# Altium PCB view_PCB_5_Braco_so_motores.PcbDoc
Units mm, origin at the board's own origin, x right, y up, seen from the top; angles counter-clockwise.
Board outline 148.5 x 97 mm, 2 copper layers (Top Layer, Bottom Layer); 75 components, 78 nets, 227 pads, 19 vias.
Unrouted connection lines stored in the file: 1.
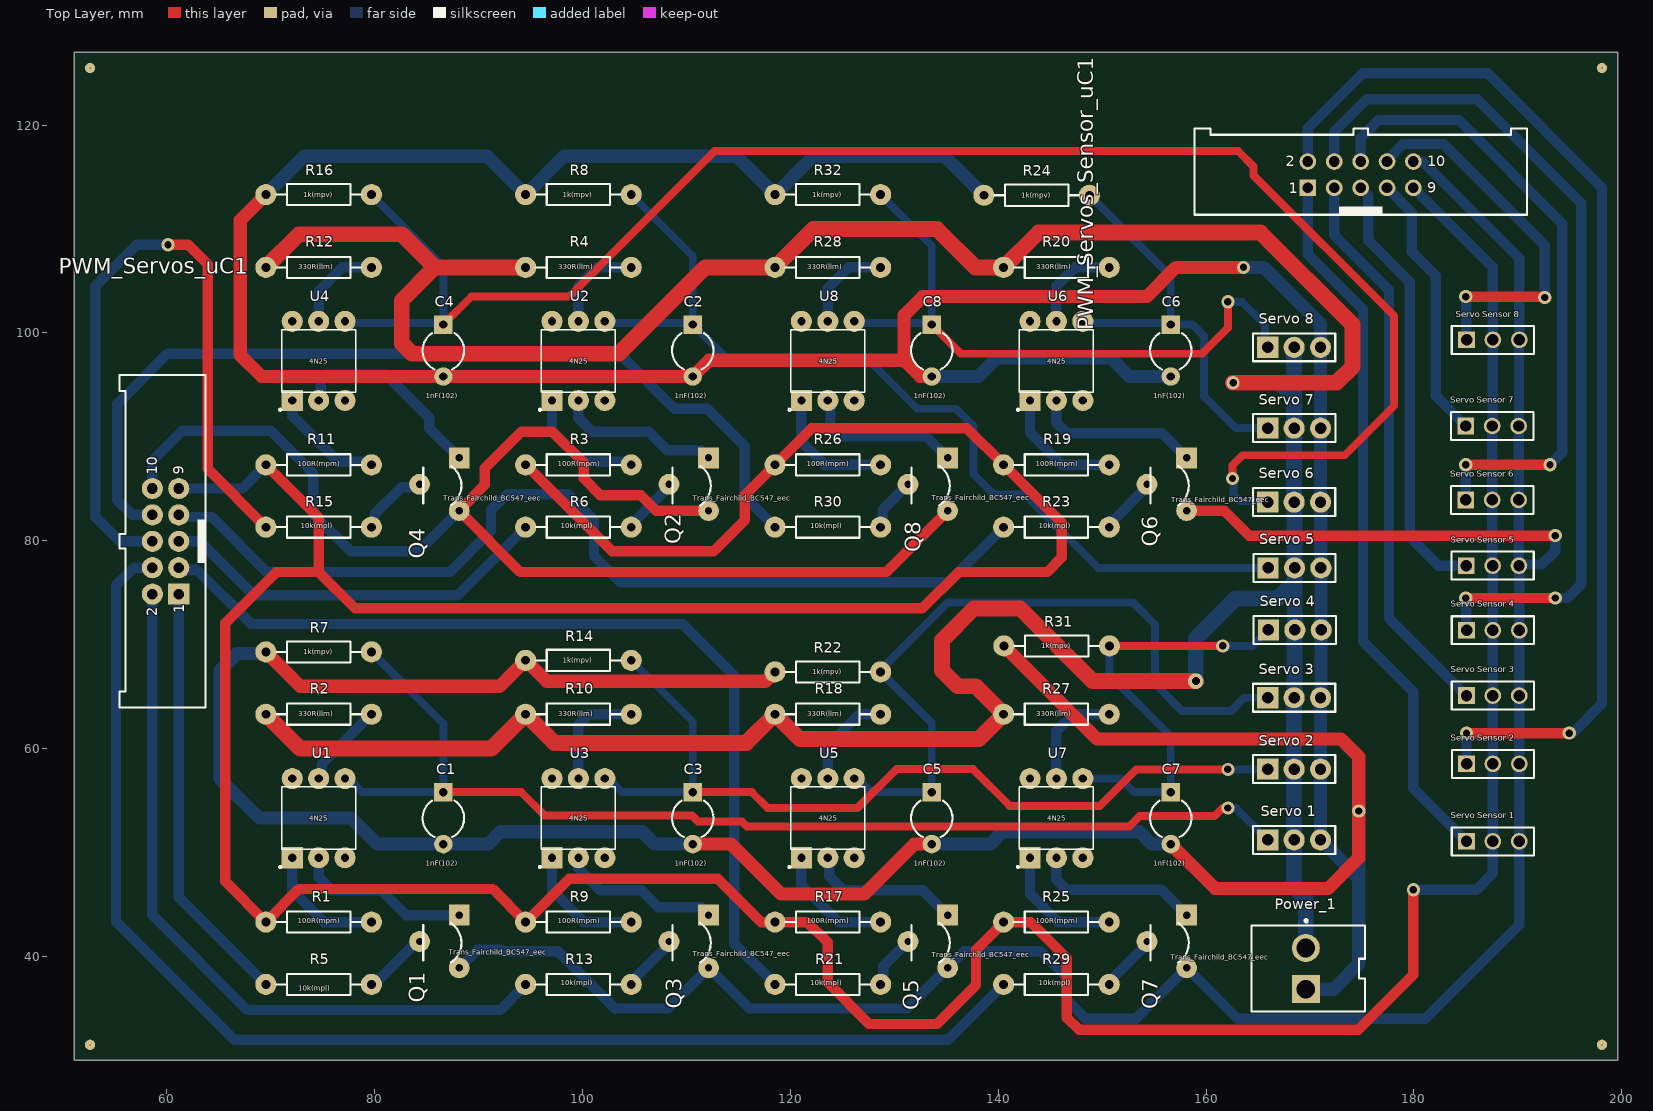
[diagram p0: Top Layer view]
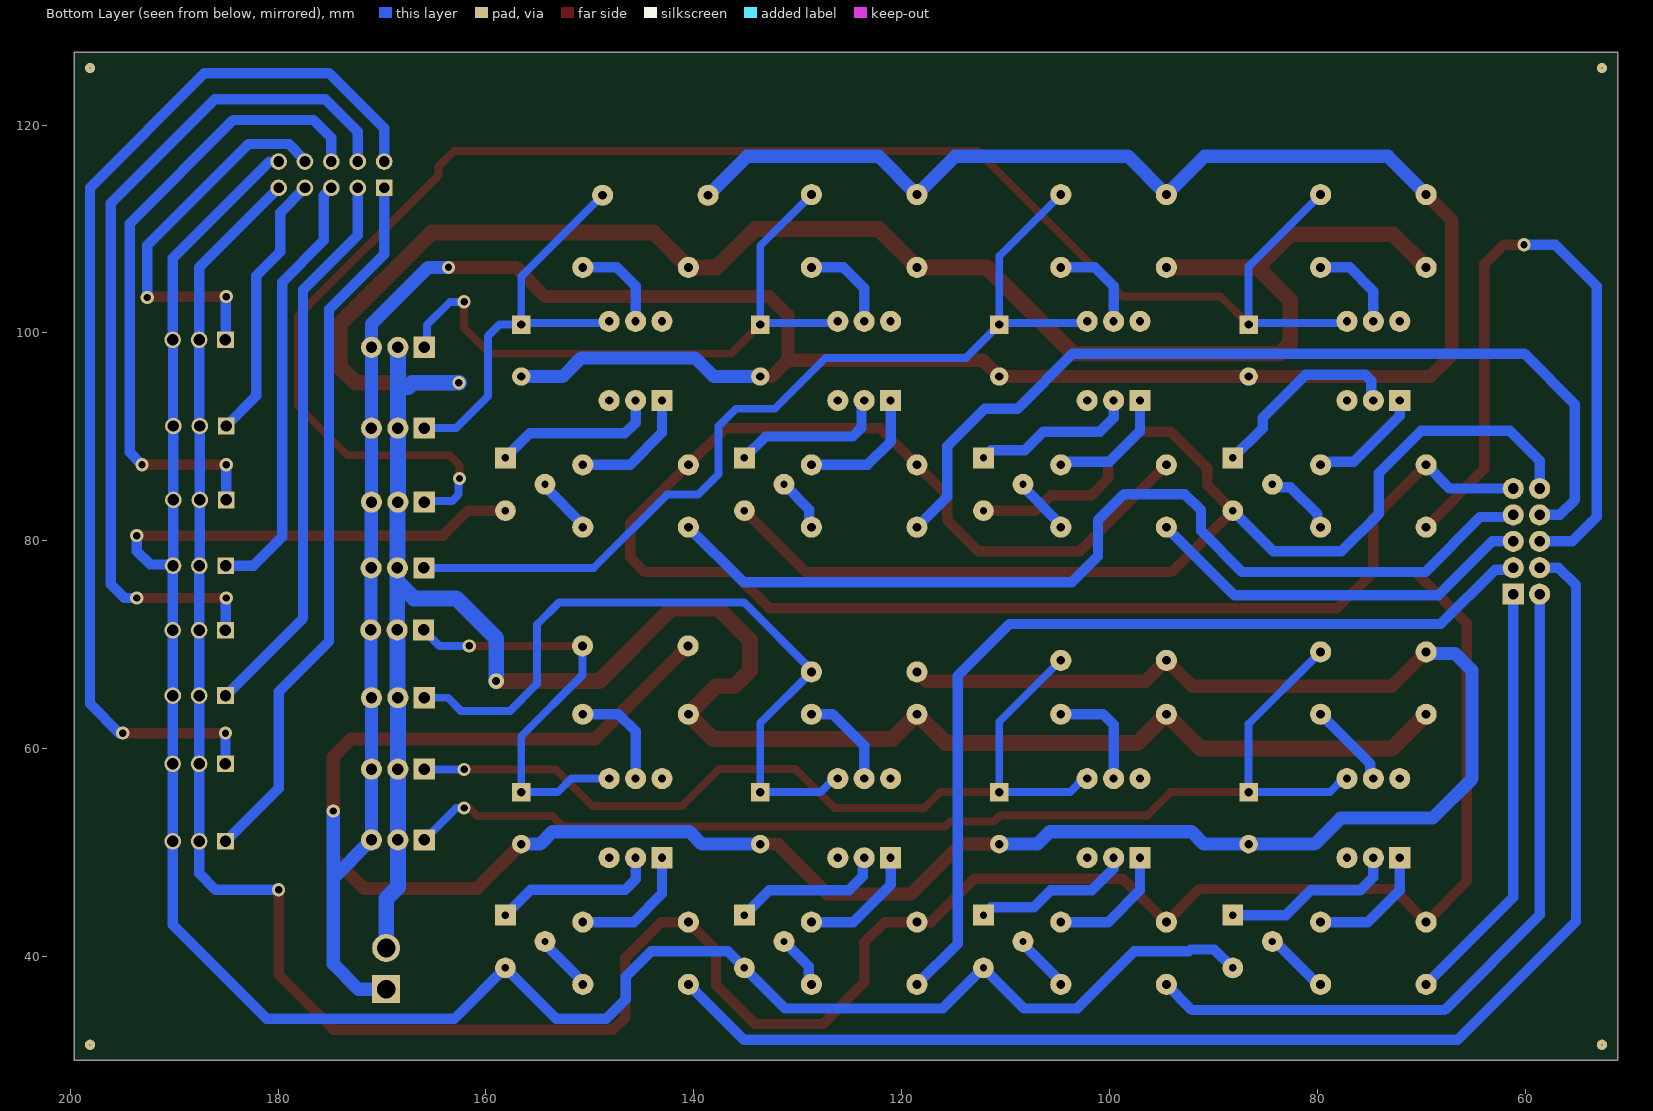
[diagram p1: Bottom Layer view, seen from below]
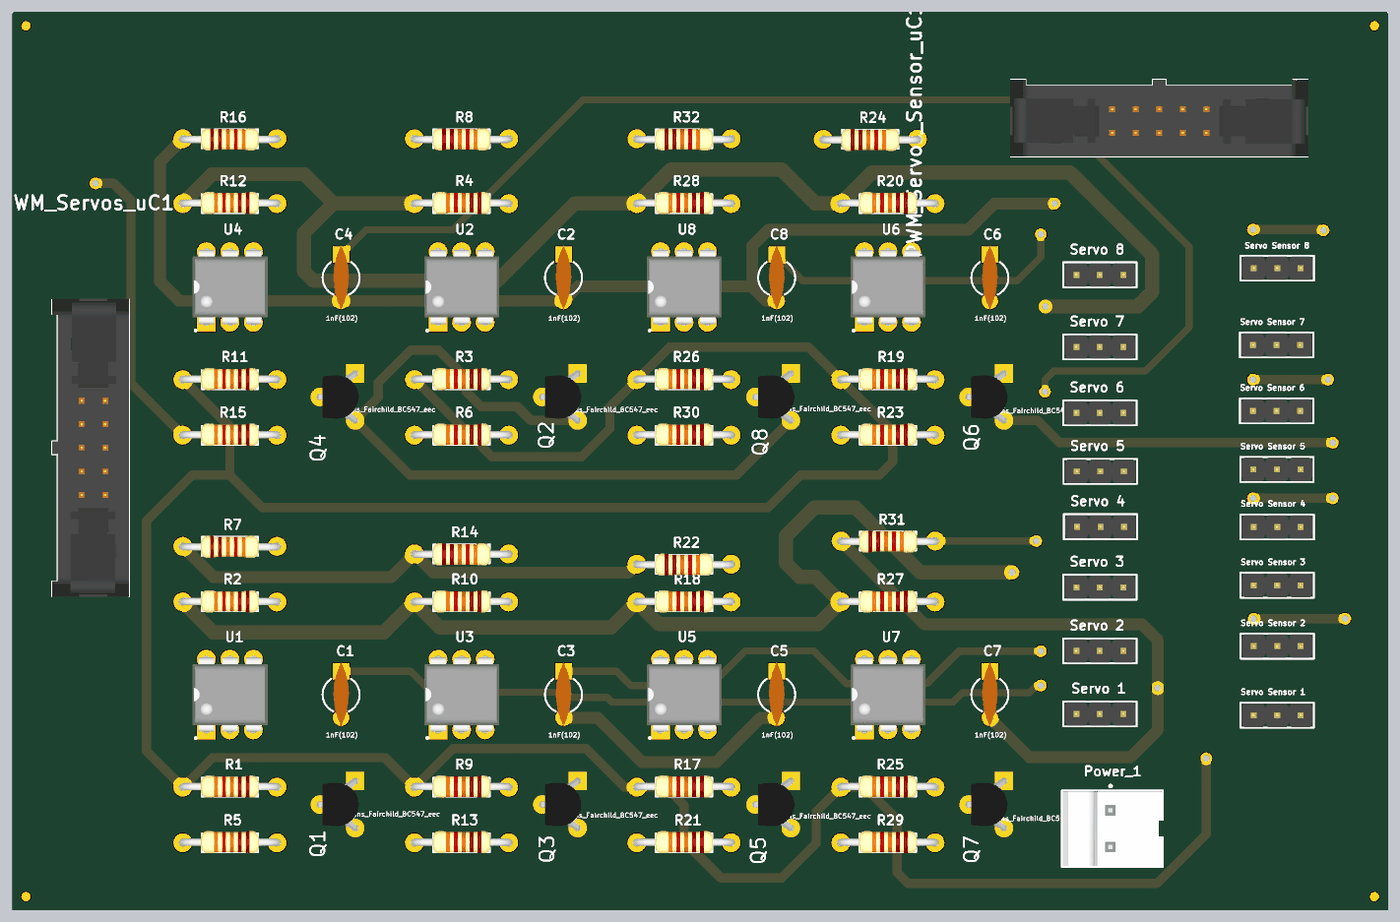
[diagram p2: 3D render of the assembled board from above, using the file's embedded part models]

## Layer stack, top to bottom
Top Solder: solder mask 0.0102, Solder Resist, Dk 3.5
Top Layer: signal copper 0.0356
Dielectric 1: dielectric 0.32, FR-4, Dk 4.8
Bottom Layer: signal copper 0.0356
Bottom Solder: solder mask 0.0102, Solder Resist, Dk 3.5

## Board outline
51.096,127 199.596,127 199.596,30 51.096,30

## Design rules (kind name [scope] priority, off if disabled: settings)
Clearance [All] p1: gap=0.1 ignorepadtopadclearanceinfootprint=FALSE except(0: Arc-Hole Track-Hole SMDPad-Hole THPad-Hole Via-Hole Fill-Hole Poly-Hole Region-Hole Text-Hole; 0.254: Arc-SMDPad Arc-THPad Arc-Via Arc-Text Track-SMDPad Track-THPad Track-Via Track-Text SMDPad-SMDPad SMDPad-THPad SMDPad-Via SMDPad-Text THPad-THPad THPad-Via THPad-Text Via-Via Via-Text Fill-Text Poly-Text Region-Text Text-Text)
ParallelSegment [All] p1: limit=800.217 gap=0.25
PolygonConnect [All] p1: connectstyle=Relief reliefconductorwidth=0.254 reliefentries=4 polygonreliefangle="90 Angle" airgapwidth=0.254
RoutingCorners [All] p1: cornerstyle=45-Degree minsetback=5.08 maxsetback=2.54
RoutingPriority [OnLayer('Bottom Layer')] p1: routingpriority=6
RoutingVias [All] p1: holewidth=0.711 width=1.57 viastyle="Through Hole" minholewidth=0.711 minwidth=1.27 maxholewidth=0.711 maxwidth=1.67
SolderMaskExpansion [All] p1: expansion=0.102
UnRoutedNet [All] p1: checkbadconnections=TRUE
Width "Schematic Width Constraint_9" [InNet('GND_8V')] p1: maxlimit=1.27 minlimit=1.27 preferedwidth=1.27
Width "Schematic Width Constraint_7" [InNet('Servo_2')] p2: maxlimit=0.762 minlimit=0.762 preferedwidth=0.762
Width "Schematic Width Constraint_6" [InNet('Servo_3')] p3: maxlimit=0.762 minlimit=0.762 preferedwidth=0.762
Width "Schematic Width Constraint_5" [InNet('Servo_4')] p4: maxlimit=0.762 minlimit=0.762 preferedwidth=0.762
Width "Schematic Width Constraint_4" [InNet('Servo_5')] p5: maxlimit=0.762 minlimit=0.762 preferedwidth=0.762
Width "Schematic Width Constraint_3" [InNet('Servo_6')] p6: maxlimit=0.762 minlimit=0.762 preferedwidth=0.762
Width "Schematic Width Constraint_2" [InNet('Servo_8')] p7: maxlimit=0.762 minlimit=0.762 preferedwidth=0.762
Width "Schematic Width Constraint_1" [InNet('Servo_7')] p8: maxlimit=0.762 minlimit=0.762 preferedwidth=0.762
Width "Schematic Width Constraint_8" [InNet('Servo_1')] p9: maxlimit=0.762 minlimit=0.762 preferedwidth=0.762
Width "Schematic Width Constraint" [InNet('VCC_8V')] p10: maxlimit=1.524 minlimit=1.27 preferedwidth=1.524
Width [All] p11: maxlimit=2 minlimit=0.2 preferedwidth=1 minimp=50.000000 maximp=50.000000 favimp=50.000000
27 further rules are at their usual default settings.

## Components (designator, comment, footprint, x,y, rotation, side; value= is the part's Value field where it differs from the comment)
C1 "1nF(102)" CAPR5-4X5 86.596,53.314 r270 top
C2 "1nF(102)" CAPR5-4X5 110.596,98.314 r270 top
C3 "1nF(102)" CAPR5-4X5 110.596,53.314 r270 top
C4 "1nF(102)" CAPR5-4X5 86.596,98.314 r270 top
C5 "1nF(102)" CAPR5-4X5 133.596,53.314 r270 top
C6 "1nF(102)" CAPR5-4X5 156.596,98.314 r270 top
C7 "1nF(102)" CAPR5-4X5 156.596,53.314 r270 top
C8 "1nF(102)" CAPR5-4X5 133.596,98.314 r270 top
Power_1 "645002114822" 645002114822 169.821,38.834 r90 top
PWM_Servos_Sensor_uC1 "61201022021" 61201022021#1 174.871,115.23 r0 top
PWM_Servos_uC1 "61201022021" 61201022021#2 59.866,79.953 r90 top
Q1 "Trans_Fairchild_BC547_eec" Fairchild_BC547_0 86.596,41.314 r180 top
Q2 "Trans_Fairchild_BC547_eec" Fairchild_BC547_0 110.596,85.314 r180 top
Q3 "Trans_Fairchild_BC547_eec" Fairchild_BC547_0 110.596,41.314 r180 top
Q4 "Trans_Fairchild_BC547_eec" Fairchild_BC547_0 86.596,85.314 r180 top
Q5 "Trans_Fairchild_BC547_eec" Fairchild_BC547_0 133.596,41.314 r180 top
Q6 "Trans_Fairchild_BC547_eec" Fairchild_BC547_0 156.596,85.314 r180 top
Q7 "Trans_Fairchild_BC547_eec" Fairchild_BC547_0 156.596,41.314 r180 top
Q8 "Trans_Fairchild_BC547_eec" Fairchild_BC547_0 133.596,85.314 r180 top
R1 "100R(mpm)" AXIAL-0.4 74.596,43.314 r180 top
R2 "330R(llm)" AXIAL-0.4 74.596,63.314 r180 top value="10K (mpl)"
R3 "100R(mpm)" AXIAL-0.4 99.596,87.314 r180 top
R4 "330R(llm)" AXIAL-0.4 99.596,106.314 r180 top
R5 "10k(mpl)" AXIAL-0.4 74.596,37.314 r180 top
R6 "10k(mpl)" AXIAL-0.4 99.596,81.314 r180 top
R7 "1k(mpv)" AXIAL-0.4 74.596,69.314 r0 top
R8 "1k(mpv)" AXIAL-0.4 99.596,113.314 r0 top
R9 "100R(mpm)" AXIAL-0.4 99.596,43.314 r180 top
R10 "330R(llm)" AXIAL-0.4 99.596,63.314 r180 top
R11 "100R(mpm)" AXIAL-0.4 74.596,87.314 r180 top
R12 "330R(llm)" AXIAL-0.4 74.596,106.314 r180 top
R13 "10k(mpl)" AXIAL-0.4 99.596,37.314 r180 top
R14 "1k(mpv)" AXIAL-0.4 99.596,68.5 r0 top
R15 "10k(mpl)" AXIAL-0.4 74.596,81.314 r180 top
R16 "1k(mpv)" AXIAL-0.4 74.596,113.314 r0 top
R17 "100R(mpm)" AXIAL-0.4 123.596,43.314 r180 top
R18 "330R(llm)" AXIAL-0.4 123.596,63.314 r180 top
R19 "100R(mpm)" AXIAL-0.4 145.596,87.314 r180 top
R20 "330R(llm)" AXIAL-0.4 145.596,106.314 r180 top
R21 "10k(mpl)" AXIAL-0.4 123.596,37.314 r180 top
R22 "1k(mpv)" AXIAL-0.4 123.596,67.388 r0 top
R23 "10k(mpl)" AXIAL-0.4 145.596,81.314 r180 top
R24 "1k(mpv)" AXIAL-0.4 143.694,113.256 r0 top
R25 "100R(mpm)" AXIAL-0.4 145.596,43.314 r180 top
R26 "100R(mpm)" AXIAL-0.4 123.596,87.314 r180 top
R27 "330R(llm)" AXIAL-0.4 145.596,63.314 r180 top
R28 "330R(llm)" AXIAL-0.4 123.596,106.314 r180 top
R29 "10k(mpl)" AXIAL-0.4 145.596,37.314 r180 top
R30 "10k(mpl)" AXIAL-0.4 123.596,81.314 r180 top
R31 "1k(mpv)" AXIAL-0.4 145.62,69.888 r0 top
R32 "1k(mpv)" AXIAL-0.4 123.596,113.314 r0 top
"Servo 1" "61300311121" 61300311121#1 168.471,51.218 r0 top
"Servo 2" "61300311121" 61300311121#1 168.471,58.027 r0 top
"Servo 3" "61300311121" 61300311121#1 168.471,64.9 r0 top
"Servo 4" "61300311121" 61300311121#1 168.537,71.433 r0 top
"Servo 5" "61300311121" 61300311121#1 168.51,77.399 r0 top
"Servo 6" "61300311121" 61300311121#1 168.471,83.723 r0 top
"Servo 7" "61300311121" 61300311121#1 168.472,90.84 r0 top
"Servo 8" "61300311121" 61300311121#1 168.471,98.624 r0 top
"Servo Sensor 1" "61300311121" 61300311121#2 187.596,51.081 r0 top
"Servo Sensor 2" "61300311121" 61300311121#2 187.602,58.537 r0 top
"Servo Sensor 3" "61300311121" 61300311121#2 187.596,65.11 r0 top
"Servo Sensor 4" "61300311121" 61300311121#2 187.602,71.398 r0 top
"Servo Sensor 5" "61300311121" 61300311121#2 187.568,77.609 r0 top
"Servo Sensor 6" "61300311121" 61300311121#2 187.529,83.933 r0 top
"Servo Sensor 7" "61300311121" 61300311121#2 187.53,91.05 r0 top
"Servo Sensor 8" "61300311121" 61300311121#2 187.602,99.341 r0 top
U1 "4N25" *DIP762W50P254L712H400Q6N 74.596,53.314 r90 top
U2 "4N25" *DIP762W50P254L712H400Q6N 99.596,97.314 r90 top
U3 "4N25" *DIP762W50P254L712H400Q6N 99.596,53.314 r90 top
U4 "4N25" *DIP762W50P254L712H400Q6N 74.596,97.314 r90 top
U5 "4N25" *DIP762W50P254L712H400Q6N 123.596,53.314 r90 top
U6 "4N25" *DIP762W50P254L712H400Q6N 145.596,97.314 r90 top
U7 "4N25" *DIP762W50P254L712H400Q6N 145.596,53.314 r90 top
U8 "4N25" *DIP762W50P254L712H400Q6N 123.596,97.314 r90 top

## Footprints (in the part's own frame and the unit in brackets; to place one, negate y for a bottom-side part, rotate by r counter-clockwise, add the part's x,y. Pads: shape width x height; smd on the part's side, far side on the other; paste and mask are expansions set on the pad)
61201022021#1 [mm] "10 pins, straight, short lever, gold plating"
  rect 1.6x1.6 hole 1.02: 1(-5.08,-1.27)
  round 1.6 hole 1.02: 2(-5.08,1.27) 3(-2.54,-1.27) 4(-2.54,1.27) 5(0,-1.27) 6(0,1.27) 7(2.54,-1.27) 8(2.54,1.27) 9(5.08,-1.27) 10(5.08,1.27)
  silkscreen extent -16,-3.85 16,4.45, body extent -16.1,-3.85 16.1,4.45, height 24.55
61201022021#2 [mm] "10 pins, straight, short lever, gold plating"
  rect 2.032x2.032 hole 1.02: 1(-5.08,-1.27)
  round 2.032 hole 1.02: 2(-5.08,1.27) 3(-2.54,-1.27) 4(-2.54,1.27) 5(0,-1.27) 6(0,1.27) 7(2.54,-1.27) 8(2.54,1.27) 9(5.08,-1.27) 10(5.08,1.27)
  silkscreen extent -16,-3.85 16,4.45, body extent -16.1,-3.85 16.1,4.45, height 24.55
61300311121#1 [mil] "Pin Header, pitch 2.54 mm, THT, Vertical, single row, 3p"
  rect 80x80 hole 43.31: 1(-100,0)
  round 80 hole 43.31: 2(0,0) 3(100,0)
  silkscreen extent -156,-53 156,53, body extent -150,-50 150,50, height 337
61300311121#2 [mil] "Pin Header, pitch 2.54 mm, THT, Vertical, single row, 3p"
  rect 62.99x62.99 hole 43.31: 1(-100,0)
  round 62.99 hole 43.31: 2(0,0) 3(100,0)
  silkscreen extent -156,-53 156,53, body extent -150,-50 150,50, height 337
645002114822 [mm] "3.96mm Male Locking Header, 2p"
  round 2.7 hole 1.8: 1(1.98,0.225)
  rect 2.7x2.7 hole 1.8: 2(-1.98,0.225)
  silkscreen extent -4.14,-5.45 4.72,5.45, body extent -4.01,-5.37 4.01,5.38, height 13.89
*DIP762W50P254L712H400Q6N [mil]
  rect 80x80 hole 31.5: 1(-150,100)
  round 80 hole 31.5: 2(-150,0) 3(-150,-100) 4(150,-100) 5(150,0) 6(150,100)
  silkscreen extent -189,-140 118,150, body extent -157,-160 157,158, height 180
AXIAL-0.4 [mil] "Axial Device, Thru-Hole; 2 Leads; 0.4 in Pin Spacing"
  round 80 hole 33.46: 1(-200,0) 2(200,0)
  silkscreen extent -160,-40 160,40, body extent -213,-49 213,45, height 142
CAPR5-4X5 [mil] "Capacitor; 2 Leads"
  rect 70x70 hole 31.5: 1(-98.43,0)
  round 70 hole 31.5: 2(98.42,0)
  silkscreen extent -66,-79 72,79, body extent -138,-33 138,33, height 335
Fairchild_BC547_0 [mm]
  rect 2x2 hole 0.71 paste-1000 mask+0: 1(-1.524,-2.667)
  round 2 hole 0.71 paste-1000 mask+0: 2(2.286,-0.127) 3(-1.524,2.413)
  silkscreen extent -1.74,-1.9 1.93,1.9, body extent -1.91,-2.92 8,2.67, height 10.54

## Part data
C1 C2 C3 C4 C5 C6 C7 C8: library part Cap2, "Capacitor", PackageDescription="Capacitor; 2 Leads", PackageReference=CAPR5-4X5, Published=23-Sep-2002, Publisher="Altium Limited"
Power_1: "WR-WTB THT Male Vertical Locking Header, pitch 3.96mm, 2p", Contact Resistance=20mOhm, Operating Temperature="-40 to +105degC", Rated Current=7A, Withstanding Voltage=1500VAC, Working Voltage=250VAC, ComponentLink1Description=Manufacturer, ComponentLink1URL=http://www.we-online.de, ComponentLink2Description=Datasheet, ComponentLink2URL=https://www.we-online.com/catalog/datasheet/645002114822.pdf, Gender=Male, Mounting Technology=THT, Packaging=Bag, Part Number=645002114822, Pin Number=2, Pitch=3.96mm, Published Date="January 2020", Publisher="Wurth Elektronik", Type=Vertical
PWM_Servos_Sensor_uC1 PWM_Servos_uC1: "Male Box Header WR-BHD with lever, THT, Vertical, pitch 2.54 mm, 10 pins", Contact Resistance="20 mOhm", Operating Temperature="-40 to 125 degC", Withstanding Voltage="500 VAC", Working Voltage="250 VAC", ComponentLink1Description=Manufacturer, ComponentLink1URL=http://www.we-online.de, ComponentLink2Description=Datasheet, ComponentLink2URL=https://katalog.we-online.de/em/datasheet/6120xx22021.pdf, Gender=Male, Mounting Technology=THT, Orientation=Vertical, Packaging=Tray, Part Number=61201022021, Pin Number=10, Pitch="2.54 mm", Published Date="August 2018", Publisher="Wurth Elektronik"
Q1 Q2 Q3 Q4 Q5 Q6 Q7 Q8: "TRANS NPN 45V 0.1A TO-92", Digikey Part Number=BC547-ND, Manufacturer=Fairchild, Mouser Part Number=512-BC547, Package=TO-92, Part Number=BC547, Power=500mW, Temperature="-65°C to +150°C", Temperature Range High=+150°C, Temperature Range Low=-65°C, ComponentLink1Description=Upverter, ComponentLink1URL=https://upverter.com/upn/revision/b6c8bf2a31a37ee3/, ComponentLink2Description=Datasheet, ComponentLink2URL=https://upverter.com/datasheet/00a4bcea94b7f6a06c7169869aec7b7ac700d7c3.pdf, Digikey Description="TRANS NPN 45V 0.1A TO-92", helpURL=https://upverter.com/upn/revision/b6c8bf2a31a37ee3/, Ipc Land Pattern Name=TO-92, Lead Free=yes, RoHS=TRUE, Supplier 1=Digi-Key, Supplier 2=Mouser, Supplier Part Number 1=BC547-ND, Supplier Part Number 2=512-BC547
R1 R2 R3 R4 R5 R6 R7 R8 R9 R10 R11 R12 R13 R14 R15 R16 R17 R18 R19 R20 R21 R22 R23 R24 R25 R26 R27 R28 R29 R30 R31 R32: library part Res2, "Resistor", LatestRevisionDate=17-Jul-2002, LatestRevisionNote="Re-released for DXP Platform.", PackageDescription="Axial Device, Thru-Hole; 2 Leads; 0.4 in Pin Spacing", PackageReference=AXIAL-0.4, Published=8-Jun-2000, Publisher="Altium Limited"
"Servo 1" "Servo 2" "Servo 3" "Servo 4" "Servo 5" "Servo 6" "Servo 7" "Servo 8" "Servo Sensor 1" "Servo Sensor 2" "Servo Sensor 3" "Servo Sensor 4" "Servo Sensor 5" "Servo Sensor 6" "Servo Sensor 7" "Servo Sensor 8": "WR-PHD Pin Header, THT, pitch 2.54mm, Single Row, Vertical, 3pin", Contact Resistance=20mOhm, Operating Temperature="-40 to +105degC", Rated Current=3A, Withstanding Voltage=500VAC, Working Voltage=250VAC, ComponentLink1Description=Manufacturer, ComponentLink1URL=http://www.we-online.de, ComponentLink2Description=Datasheet, ComponentLink2URL=https://katalog.we-online.de/em/datasheet/6130xx11121.pdf, Gender=Male, Mounting Technology=THT, Orientation=Vertical, Packaging=Bag, Part Number=61300311121, Pin Number=3, Pitch=2.54mm, Published Date="June 2019", Publisher="Wurth Elektronik", Row Number=Single
U1 U2 U3 U4 U5 U6 U7 U8: "Optoisolator Transistor with Base Output 5000Vrms 1 Channel 6-DIP", Package="DIP-6 Lite-On", Digi-Key_Part_Number=4N25VS-ND, Digi-Key_Purchase_URL=https://www.digikey.com/product-detail/en/vishay-semiconductor-opto-division/4N25/4N25VS-ND/1738516?utm_source=snapeda&utm_medium=aggregator&utm_campaign=symbol, MF="Vishay Semiconductor", MP=4N25, SnapEDA_Link=https://www.snapeda.com/parts/4N25/Vishay%20Semiconductor%20Opto%20Division/view-part/641454/?ref=snap

## Free pads (board coordinates)
  round 1 hole 0.1: 1(52.596,31.5) 1(52.596,125.5) 1(198.096,31.5) 1(198.096,125.5)
  round 1.524 hole 0.762: 2(159.009,66.5)

## Via types
v1: diameter 1.27, hole 0.711, Top Layer to Bottom Layer, 19 vias

## Nets (pads, with @x,y where several pads share a name; then routed paths per layer and width w, separated by ;. In a path a pad name is that pad's centre, name@x,y a point inside that pad or via, vN(x,y) a via of type N, cw(c..) or ccw(c..) an arc to the next point about the centre after c; other vN are vias at no path point)
3V3_uC: 
"ADD 1": 
"ADD 2": 
"ADD 3": 
"ADD 4": 
"ADD 5": 
"ADD 6": 
DBG0: 
DBG1: 
DBG2: 
"GND (SENSOR)": 
GND_8V: "Servo 1.3" "Servo 2.3" "Servo 3.3" "Servo 4.3" "Servo 5.3" "Servo 6.3" "Servo 7.3" "Servo 8.3" C1.2 C2.2 C3.2 C4.2 C5.2 C6.2 C7.2 C8.2 Power_1.2 R7.1 R8.1 R14.1 R16.1 R22.1 R24.1 R31.1 R32.1 | length 550.5
  Top Layer w1.27: R7.1 72.83,66 92.016,66 R14.1 96.536,66.48 117.608,66.48 R22.1 ; R16.1 67.059,110.856 67.059,97.874 69.119,95.814 C4.2 C2.2 112.168,97.385 130.929,97.385 ; C3.2 114.282,50.814 119.096,46 127.096,46 131.91,50.814 C5.2 ; C8.2 132.501,95.814 130.989,97.326 ; R31.1 149.511,60.917 172.991,60.917 174.696,59.212 v1(174.696,54) 174.696,49.5 171.74,46.544 160.866,46.544 C7.2 ; v1(163.596,106.314) 157.096,106.314 154.283,103.5 132.712,103.5 130.929,101.717 130.929,97.385 ; 170.865,51.072 171.011,51.218 ; 130.929,97.385 130.989,97.326 ; 130.929,97.385 130.929,97.266 130.989,97.326 ; 130.929,97.385 131.048,97.385 130.989,97.326
  Bottom Layer w1.27: R7.1 69.37,69.168 66.764,69.168 65.096,67.5 65.096,57.124 68.906,53.314 77.748,53.314 80.248,50.814 C1.2 90.91,50.814 92.096,52 105.749,52 106.936,50.814 C3.2 ; R16.1 73.203,117 90.829,117 R8.1 98.203,117 114.829,117 R32.1 122.203,117 134.871,117 R24.1 ; C5.2 139.213,50.814 140.399,52 153.596,52 154.783,50.813 C7.2 ; C8.2 138.084,95.814 139.876,97.606 150.803,97.606 152.596,95.814 C6.2 ; v1(163.596,106.314) 165.558,106.314 171.011,100.86 171.011,98.624 ; Power_1.2 172.269,36.854 174.696,39.281 174.696,47.533 ; 171.011,98.623 171.011,90.841 171.011,83.723 171.03,83.704 171.03,77.419 171.05,77.399 171.064,77.386 171.064,71.446 171.077,71.433 171.044,71.399 171.044,64.933 171.011,64.9 171.011,58.027 171.011,51.218 174.696,47.533 ; v1(174.696,54) 174.696,47.533
GND_uC: "Servo Sensor 1.3" "Servo Sensor 2.3" "Servo Sensor 3.3" "Servo Sensor 4.3" "Servo Sensor 5.3" "Servo Sensor 6.3" "Servo Sensor 7.3" "Servo Sensor 8.3" PWM_Servos_Sensor_uC1.10 PWM_Servos_uC1.10 Q1.3 Q2.3 Q3.3 Q4.3 Q5.3 Q6.3 Q7.3 Q8.3 | length 368.8
  Top Layer w1: Q2.3 107.089,82.9 105.596,84.394 101.702,84.394 100.096,86 100.096,87.5 97.096,90.5 94.116,90.5 90.596,86.98 90.596,85.377 Q4.3 94.02,77 129.219,77 Q8.3 ; Q6.3 161.756,82.9 164.156,80.5 v1(193.596,80.5)
  Bottom Layer w1: PWM_Servos_uC1.10 58.596,87.73 61.476,90.61 69.986,90.61 74.096,86.5 74.096,82.578 77.674,79 84.219,79 Q4.3 ; Q1.3 89.888,40.668 92.195,40.668 92.364,40.5 97.596,40.5 103.096,35 108.219,35 Q3.3 116.021,35 131.219,35 Q5.3 136.719,40.5 144.096,40.5 146.535,38.061 146.535,35.865 148.4,34 153.219,34 Q7.3 163.021,34 181.096,34 190.136,43.04 190.136,51.081 190.139,51.084 190.139,58.534 190.142,58.537 190.139,58.54 190.139,65.107 190.136,65.11 190.142,65.116 190.142,71.398 190.125,71.415 190.125,77.592 190.108,77.609 ; PWM_Servos_Sensor_uC1.10 180.833,116.5 190.142,107.191 190.142,99.341 190.106,99.305 190.106,91.086 190.07,91.05 190.07,83.933 190.088,83.914 190.088,77.628 190.108,77.609 ; v1(193.596,80.5) 193.596,79 192.32,77.724 190.223,77.724 190.108,77.609
I2C1-SCL: 
I2C1-SDA: 
I2C2-SCL: 
I2C2-SDA: 
I2C3-SCL: 
I2C3-SDA: 
NetQ1_1: Q1.1 U1.2 | length 16.9
  Bottom Layer w1: U1.2 74.596,47.624 75.835,46.385 80.629,46.385 83.033,43.981 Q1.1
NetQ1_2: Q1.2 R5.1 | length 6.3
  Bottom Layer w1: R5.1 79.929,37.313 84.056,41.441 Q1.2
NetQ2_1: Q2.1 U2.2 | length 15.8
  Bottom Layer w1: U2.2 99.596,91.84 100.936,90.5 106.373,90.5 108.142,88.731 111.37,88.731 Q2.1
NetQ2_2: Q2.2 R6.1 | length 5.6
  Bottom Layer w1: R6.1 104.676,81.56 108.31,85.194 Q2.2
NetQ3_1: Q3.1 U3.2 | length 15.4
  Bottom Layer w1: U3.2 99.596,48.5 101.711,46.385 105.634,46.385 107.288,44.731 111.37,44.731 Q3.1
NetQ3_2: Q3.2 R13.1 | length 5.6
  Bottom Layer w1: R13.1 104.676,37.56 108.31,41.194 Q3.2
NetQ4_1: Q4.1 U4.2 | length 19.5
  Bottom Layer w1: U4.2 74.793,93.701 74.793,95.414 75.379,96 81.096,96 85.26,91.836 85.26,90.84 Q4.1
NetQ4_2: Q4.2 R15.1 | length 6.9
  Bottom Layer w1: R15.1 79.969,81.607 79.969,82.544 82.579,85.153 84.023,85.153 Q4.2
NetQ5_1: Q5.1 U5.2 | length 14.8
  Bottom Layer w1: U5.2 123.745,49.355 123.745,47.738 125.098,46.385 132.716,46.385 Q5.1
NetQ5_2: Q5.2 R21.1 | length 5.2
  Bottom Layer w1: R21.1 128.949,37.587 128.949,39.08 Q5.2
NetQ6_1: Q6.1 U6.2 | length 16.1
  Bottom Layer w1: U6.2 145.596,91.367 146.623,90.34 155.76,90.34 Q6.1
NetQ6_2: Q6.2 R23.1 | length 5.6
  Bottom Layer w1: R23.1 150.676,81.56 154.31,85.194 Q6.2
NetQ7_1: Q7.1 U7.2 | length 16
  Bottom Layer w1: U7.2 145.596,47.425 146.596,46.425 155.676,46.425 Q7.1
NetQ7_2: Q7.2 R29.1 | length 5.6
  Bottom Layer w1: R29.1 150.676,37.56 154.31,41.194 Q7.2
NetQ8_1: Q8.1 U8.2 | length 15.2
  Bottom Layer w1: U8.2 123.857,93.242 123.857,90.872 124.69,90.04 133.06,90.04 Q8.1
NetQ8_2: Q8.2 R30.1 | length 5.2
  Bottom Layer w1: R30.1 128.873,81.511 128.873,83.004 Q8.2
NetR1_1: R1.1 U1.1 | length 12
  Bottom Layer w1: U1.1 72.056,46.385 75.127,43.314 R1.1
NetR2_1: R2.1 U1.5 | length 8.3
  Bottom Layer w1: U1.5 74.889,57.417 74.889,58.527 R2.1
NetR3_1: R3.1 U2.1 | length 11.9
  Bottom Layer w1: U2.1 97.056,90.54 99.989,87.607 104.383,87.607 R3.1
NetR4_1: R4.1 U2.5 | length 9.2
  Bottom Layer w1: U2.5 99.596,104.5 101.41,106.314 R4.1
NetR9_1: R9.1 U3.1 | length 12
  Bottom Layer w1: U3.1 97.056,46.385 100.127,43.314 R9.1
NetR10_1: R10.1 U3.5 | length 10.7
  Bottom Layer w1: U3.5 99.596,62.297 100.612,63.313 R10.1
NetR11_1: R11.1 U4.1 | length 11
  Bottom Layer w1: U4.1 72.056,92.04 76.489,87.607 79.383,87.607 R11.1
NetR12_1: R12.1 U4.5 | length 8.9
  Bottom Layer w1: U4.5 74.596,104.027 76.882,106.314 R12.1
NetR17_1: R17.1 U5.1 | length 11.7
  Bottom Layer w1: U5.1 121.056,46.925 124.667,43.314 R17.1
NetR18_1: R18.1 U5.5 | length 9.5
  Bottom Layer w1: U5.5 123.596,60.266 126.644,63.314 R18.1
NetR19_1: R19.1 U6.1 | length 12
  Bottom Layer w1: U6.1 143.056,90.38 146.123,87.314 R19.1
NetR20_1: R20.1 U6.5 | length 9.2
  Bottom Layer w1: U6.5 145.596,104.5 147.41,106.314 R20.1
NetR25_1: R25.1 U7.1 | length 12.2
  Bottom Layer w1: U7.1 143.056,46.04 145.782,43.314 R25.1
NetR26_1: R26.1 U8.1 | length 12.5
  Bottom Layer w1: U8.1 121.056,89.55 123.292,87.314 R26.1
NetR27_1: R27.1 U7.5 | length 10.3
  Bottom Layer w1: U7.5 145.596,61.667 147.243,63.314 R27.1
NetR28_1: R28.1 U8.5 | length 9.1
  Bottom Layer w1: U8.5 123.596,104.298 125.612,106.314 R28.1
PWM_Servo_1: PWM_Servos_uC1.1 R5.2 | length 41
  Bottom Layer w1: PWM_Servos_uC1.1 61.136,45.694 R5.2
PWM_Servo_2: PWM_Servos_uC1.2 R13.2 | length 71.6
  Bottom Layer w1: PWM_Servos_uC1.2 58.596,44 67.748,34.848 92.05,34.848 R13.2
PWM_Servo_3: PWM_Servos_uC1.3 R21.2 | length 89.1
  Bottom Layer w1: PWM_Servos_uC1.3 61.333,77.216 62.88,77.216 68.096,72 109.596,72 114.596,67 114.596,41.234 R21.2
PWM_Servo_4: PWM_Servos_uC1.4 R29.2 | length 128.9
  Bottom Layer w1: PWM_Servos_uC1.4 56.793,77.413 55.096,75.716 55.096,43.401 66.497,32 135.202,32 R29.2
PWM_Servo_5: PWM_Servos_uC1.5 R6.2 | length 38.2
  Bottom Layer w1: PWM_Servos_uC1.5 63.143,79.953 68.336,74.76 87.962,74.76 R6.2
PWM_Servo_6: PWM_Servos_uC1.6 R15.2 | length 69.6
  Top Layer w1: v1(60.096,108.5) 62.052,108.5 63.916,106.636 63.916,86.914 R15.2
  Bottom Layer w1: PWM_Servos_uC1.6 55.456,79.953 53.096,82.314 53.096,104.5 57.096,108.5 v1(60.096,108.5)
PWM_Servo_7: PWM_Servos_uC1.7 R23.2 | length 93.7
  Bottom Layer w1: PWM_Servos_uC1.7 61.333,82.296 64.3,82.296 69.596,77 87.225,77 91.182,80.956 91.182,82.941 92.741,84.5 98.596,84.5 101.096,82 101.096,78.511 103.607,76 135.202,76 R23.2
PWM_Servo_8: PWM_Servos_uC1.8 R30.2 | length 88.3
  Bottom Layer w1: PWM_Servos_uC1.8 56.65,82.493 55.216,83.927 55.216,93.164 60.052,98 103.551,98 108.838,92.714 111.992,92.714 115.596,89.11 115.596,84.234 R30.2
Sensor_Servo_1: "Servo Sensor 1.1" PWM_Servos_Sensor_uC1.1 | length 69.2
  Bottom Layer w1: PWM_Servos_Sensor_uC1.1 169.791,107.58 175.096,102.275 175.096,70.355 179.951,65.5 179.951,56.186 185.056,51.081
Sensor_Servo_2: "Servo Sensor 2.1" PWM_Servos_Sensor_uC1.2 | length 105.1
  Top Layer w1: v1(185.062,61.5) v1(194.941,61.5)
  Bottom Layer w1: PWM_Servos_Sensor_uC1.2 169.791,119.695 175.096,125 187.096,125 198.096,114 198.096,64.31 195.286,61.5 v1(194.941,61.5) ; 185.062,58.537 v1(185.062,61.5)
Sensor_Servo_3: "Servo Sensor 3.1" PWM_Servos_Sensor_uC1.3 | length 54.1
  Bottom Layer w1: PWM_Servos_Sensor_uC1.3 172.331,109.411 177.596,104.146 177.596,72.57 185.056,65.11
Sensor_Servo_4: "Servo Sensor 4.1" PWM_Servos_Sensor_uC1.4 | length 83.5
  Top Layer w1: v1(184.989,74.5) v1(193.596,74.5)
  Bottom Layer w1: PWM_Servos_Sensor_uC1.4 172.331,119.36 175.471,122.5 186.096,122.5 196.096,112.5 196.096,75.81 194.786,74.5 v1(193.596,74.5) ; v1(184.989,74.5) 185.026,74.463 185.026,71.434 185.062,71.398
Sensor_Servo_5: "Servo Sensor 5.1" PWM_Servos_Sensor_uC1.5 | length 42.1
  Bottom Layer w1: PWM_Servos_Sensor_uC1.5 175.596,113.235 175.596,108.902 179.596,104.903 179.596,80.386 182.372,77.609 185.028,77.609
Sensor_Servo_6: "Servo Sensor 6.1" PWM_Servos_Sensor_uC1.6 | length 61.7
  Top Layer w1: v1(184.989,87.314) v1(193.096,87.313)
  Bottom Layer w1: PWM_Servos_Sensor_uC1.6 174.896,116.525 174.896,118.8 176.596,120.5 184.289,120.5 194.286,110.503 194.286,88.503 v1(193.096,87.313) ; 184.989,83.933 v1(184.989,87.314)
Sensor_Servo_7: "Servo Sensor 7.1" PWM_Servos_Sensor_uC1.7 | length 26
  Bottom Layer w1: PWM_Servos_Sensor_uC1.7 179.793,111.578 179.793,107.803 182.096,105.5 182.096,93.944 184.99,91.05
Sensor_Servo_8: "Servo Sensor 8.1" PWM_Servos_Sensor_uC1.8 | length 36.8
  Top Layer w1: v1(184.989,103.5) 192.517,103.5 v1(192.596,103.421)
  Bottom Layer w1: PWM_Servos_Sensor_uC1.8 177.411,116.633 178.971,118.193 182.836,118.193 192.596,108.433 v1(192.596,103.421) ; v1(184.989,103.5) 185.026,103.464 185.026,99.378 185.062,99.341
Servo_1: "Servo 1.1" C1.1 R7.2 U1.4 | length 109.1
  Top Layer w0.762: C1.1 94.096,55.814 96.346,53.564 110.532,53.564 111.096,53 115.32,53 115.82,52.5 152.596,52.5 153.596,53.5 160.808,53.5 161.596,54.288 v1(162.096,54.288)
  Bottom Layer w0.762: U1.4 77.48,57.124 78.79,55.814 C1.1 86.596,62.394 R7.2 ; v1(162.096,54.288) 162.861,54.288 165.931,51.218
Servo_2: "Servo 2.1" C3.1 R14.2 U3.4 | length 84.6
  Top Layer w0.762: C3.1 116.282,55.814 117.808,54.288 126.464,54.288 130.203,58.027 137.569,58.027 141.096,54.5 149.782,54.5 153.282,58 v1(162.096,58)
  Bottom Layer w0.762: U3.4 102.48,57.124 103.79,55.814 C3.1 110.596,62.58 R14.2 ; v1(162.096,58) 165.904,58 165.931,58.027
Servo_3: "Servo 3.1" C5.1 R22.2 U5.4 | length 70
  Bottom Layer w0.762: U5.4 126.48,57.124 127.79,55.814 C5.1 133.596,62.468 128.58,67.484 135.15,74.054 152.975,74.054 155.096,71.933 155.096,66.221 157.687,63.63 162.386,63.63 163.656,64.9 165.931,64.9
Servo_4: "Servo 4.1" C7.1 R31.2 U7.4 | length 41.5
  Top Layer w0.762: R31.2 v1(161.596,69.888)
  Bottom Layer w0.762: U7.4 151.786,57.124 153.096,55.814 C7.1 156.596,61.187 150.7,67.083 R31.2 ; v1(161.596,69.888) 164.452,69.888 165.997,71.433
Servo_5: "Servo 5.1" C2.1 R8.2 U2.4 | length 91.3
  Bottom Layer w0.762: U2.4 102.291,100.969 110.441,100.969 C2.1 ; R8.2 110.596,107.394 C2.1 ; 165.97,77.399 149.623,77.399 142.578,84.445 139.58,84.445 137.596,86.428 137.596,91.05 135.933,92.714 132.196,92.714 127.303,97.606 113.803,97.606 C2.1
Servo_6: "Servo 6.1" C4.1 R16.2 U4.4 | length 163.5
  Top Layer w0.762: C4.1 89.282,103.5 98.694,103.5 112.694,117.5 163.096,117.5 164.566,116.03 164.566,115.161 178.096,101.631 178.096,93 173.332,88.236 163.502,88.236 162.542,87.275 v1(162.542,86)
  Bottom Layer w0.762: U4.4 77.291,100.969 86.441,100.969 C4.1 86.596,106.394 R16.2 ; v1(162.542,86) 162.64,85.903 162.64,84.445 163.267,83.817 165.837,83.817 165.931,83.723
Servo_7: "Servo 7.1" C6.1 R24.2 U6.4 | length 41.1
  Bottom Layer w0.762: U6.4 148.291,100.969 156.441,100.969 C6.1 ; R24.2 156.596,105.435 C6.1 ; 165.932,90.84 162.866,90.84 159.794,93.912 159.794,99.715 158.695,100.814 C6.1
Servo_8: "Servo 8.1" C8.1 R32.2 U8.4 | length 62.1
  Top Layer w0.762: C8.1 136.41,98 159.596,98 162.096,100.5 v1(162.096,103)
  Bottom Layer w0.762: U8.4 126.291,100.969 133.441,100.969 C8.1 133.596,108.394 R32.2 ; v1(162.096,103) 163.44,103 165.657,100.783 165.657,98.897 165.931,98.624
"VCC  (SENSOR)": 
VCC_8V: "Servo 1.2" "Servo 2.2" "Servo 3.2" "Servo 4.2" "Servo 5.2" "Servo 6.2" "Servo 7.2" "Servo 8.2" pad.2 Power_1.1 R2.2 R4.2 R10.2 R12.2 R18.2 R20.2 R27.2 R28.2 | length 353.6
  Top Layer w1.524: R2.2 72.829,60 91.203,60 R10.2 97.273,60.556 115.759,60.556 R18.2 120.913,60.917 138.119,60.917 R27.2 137.83,66 136.103,66 134.596,67.507 134.596,70.433 137.663,73.5 142.096,73.5 149.096,66.5 pad.2 ; R12.2 72.702,109.5 82.596,109.5 85.008,107.088 85.782,106.314 ; R4.2 85.782,106.314 ; v1(162.596,95.206) 172.538,95.206 174.096,96.764 174.096,100.803 165.226,109.672 143.875,109.672 R20.2 137.782,106.314 134.096,110 122.202,110 R28.2 111.803,106.314 103.49,98 83.596,98 82.596,99 82.596,103.127 85.782,106.314 ; 168.374,64.997 168.471,64.9
  Bottom Layer w1.524: pad.2 159.009,70.616 162.857,74.463 166.919,74.463 168.51,76.054 ; v1(162.596,95.206) 167.03,95.206 167.464,94.772 168.471,94.772 ; 168.44,71.53 168.524,71.446 ; 168.471,83.723 168.49,83.704 168.49,77.419 168.51,77.399 168.524,77.386 168.524,71.446 ; 168.471,83.724 168.471,90.84 168.471,94.772 ; 168.471,98.623 168.471,94.772 ; Power_1.1 169.596,45.544 168.471,46.668 168.471,51.218 168.471,58.027 168.471,64.9 168.504,64.933 168.504,71.399 168.537,71.433 168.524,71.446
VCC_uC: "Servo Sensor 1.2" "Servo Sensor 2.2" "Servo Sensor 3.2" "Servo Sensor 4.2" "Servo Sensor 5.2" "Servo Sensor 6.2" "Servo Sensor 7.2" "Servo Sensor 8.2" PWM_Servos_Sensor_uC1.9 PWM_Servos_uC1.9 R1.2 R3.2 R9.2 R11.2 R17.2 R19.2 R25.2 R26.2 | length 431.1
  Top Layer w1: R11.2 74.596,82.233 74.596,77 ; R3.2 102.83,79 112.596,79 115.596,82 115.596,84.394 R26.2 122.043,90.84 136.989,90.84 R19.2 146.096,81.734 146.096,78.399 144.697,77 136.202,77 132.702,73.5 78.096,73.5 74.596,77 ; v1(179.951,46.425) 179.951,38.259 174.627,32.935 147.773,32.935 146.596,34.112 146.596,39.831 143.114,43.314 R25.2 137.857,40.655 137.857,37.261 134.096,33.5 127.596,33.5 123.596,37.5 123.596,41.357 121.639,43.314 R17.2 117.207,43.314 113.021,47.5 98.702,47.5 R9.2 91.33,46.5 72.702,46.5 R1.2 65.596,47.234 65.596,72.08 70.516,77 74.596,77 ; 187.596,50.955 187.596,51.081
  Bottom Layer w1: PWM_Servos_uC1.9 67.236,85.033 R11.2 ; v1(179.951,46.425) 186.021,46.425 187.596,48 187.596,51.081 187.599,51.084 187.599,58.534 187.602,58.537 187.599,58.54 187.599,65.107 187.596,65.11 187.599,65.113 187.599,71.395 187.602,71.398 187.585,71.415 187.585,77.592 187.568,77.609 187.529,77.648 187.529,83.933 187.53,91.05 187.566,91.086 187.566,99.305 187.602,99.341 187.602,106.309 PWM_Servos_Sensor_uC1.9
pads on no net: U1.3 U1.6 U2.3 U2.6 U3.3 U3.6 U4.3 U4.6 U5.3 U5.6 U6.3 U6.6 U7.3 U7.6 U8.3 U8.6

## Other copper
Top Layer:
  text "Lightweight Robot Arm v2.0" at 52,131 h2

## Dimensions
199.596,127 to 51.096,127 on Top Overlay
50.5,127 to 50.5,30 on Top Overlay

## Text inside footprints (layer, text, board x,y; h text height)
PWM_Servos_Sensor_uC1: Top Overlay "2" at 167.671,116.03 h1.02; Top Overlay "10" at 181.271,116.03 h1.02; Top Overlay "1" at 167.971,113.43 h1.02; Top Overlay "9" at 181.271,113.49 h1.02
PWM_Servos_uC1: Top Overlay "2" at 59.066,72.753 h1.02 r90; Top Overlay "10" at 59.066,86.353 h1.02 r90; Top Overlay "1" at 61.666,73.053 h1.02 r90; Top Overlay "9" at 61.606,86.353 h1.02 r90